# Altium PCB SuperGameBro_RevA0.PcbDoc (part 1 of 2)
Units mil, origin at the board's own origin, x right, y up, seen from the top; angles counter-clockwise.
Board outline 6943 x 4294 mil, 4 copper layers (Top Layer, GND, 3V3P, Bottom Layer), stack 33.234 mil thick; 149 components, 155 nets, 708 pads, 342 vias.
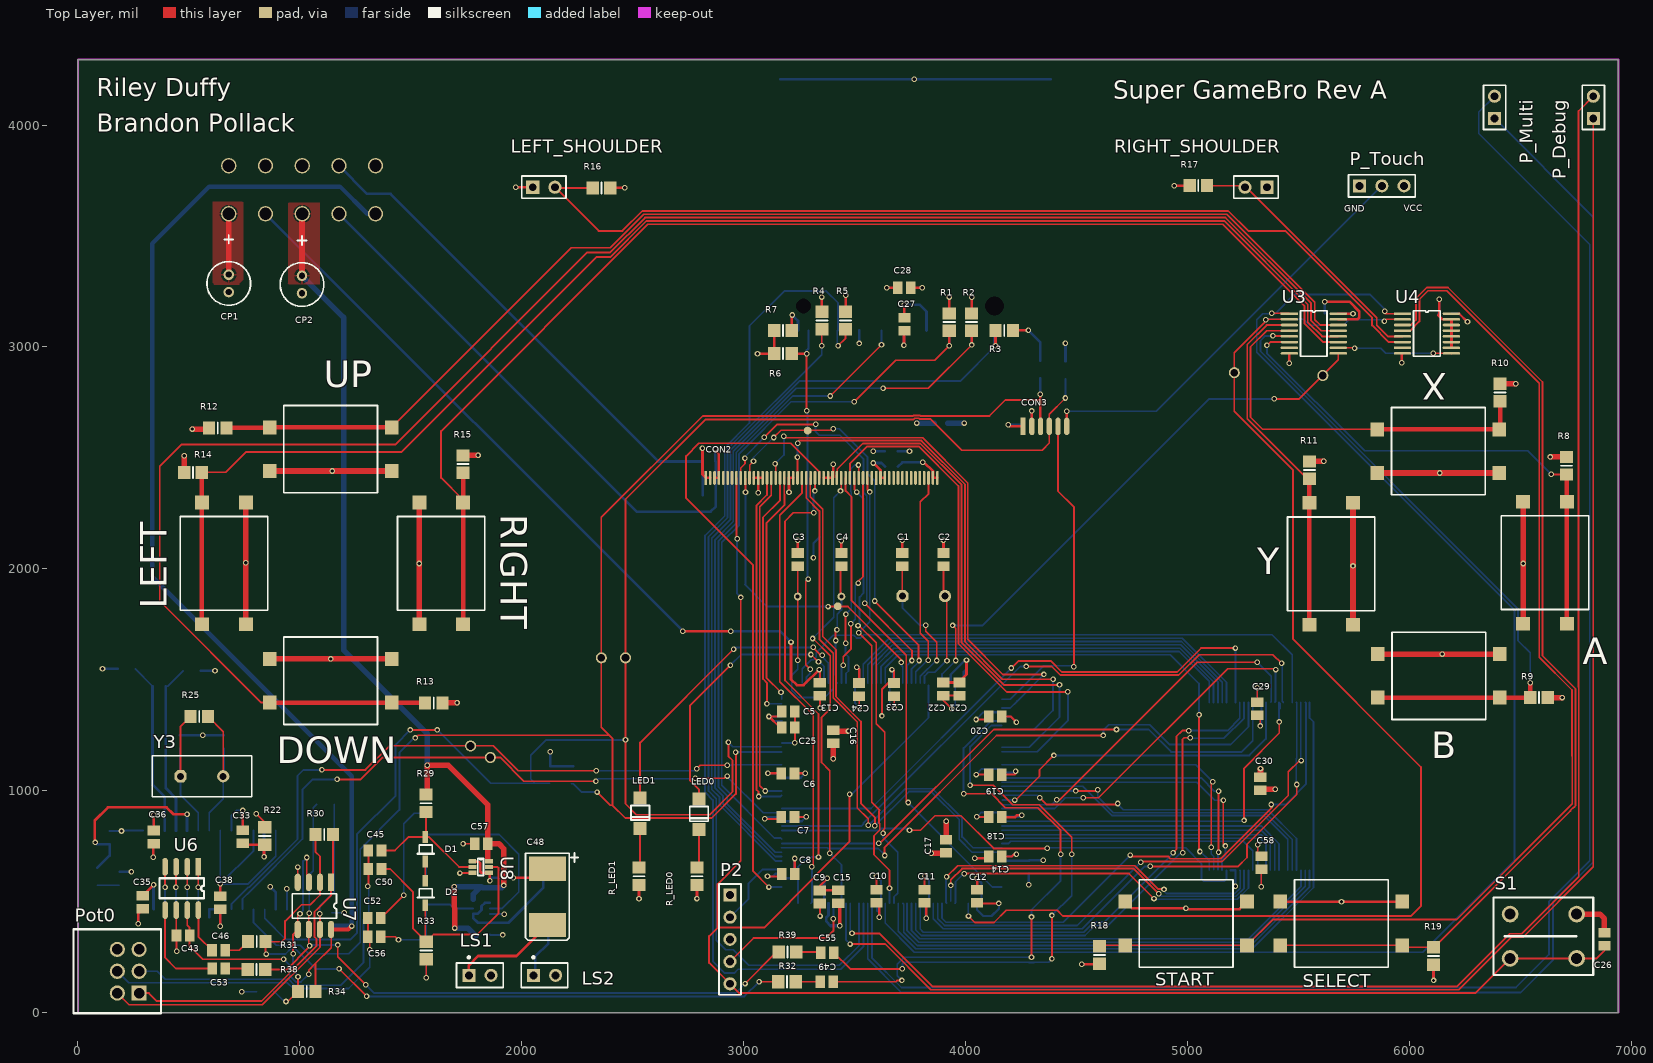
[diagram p0: Top Layer view]
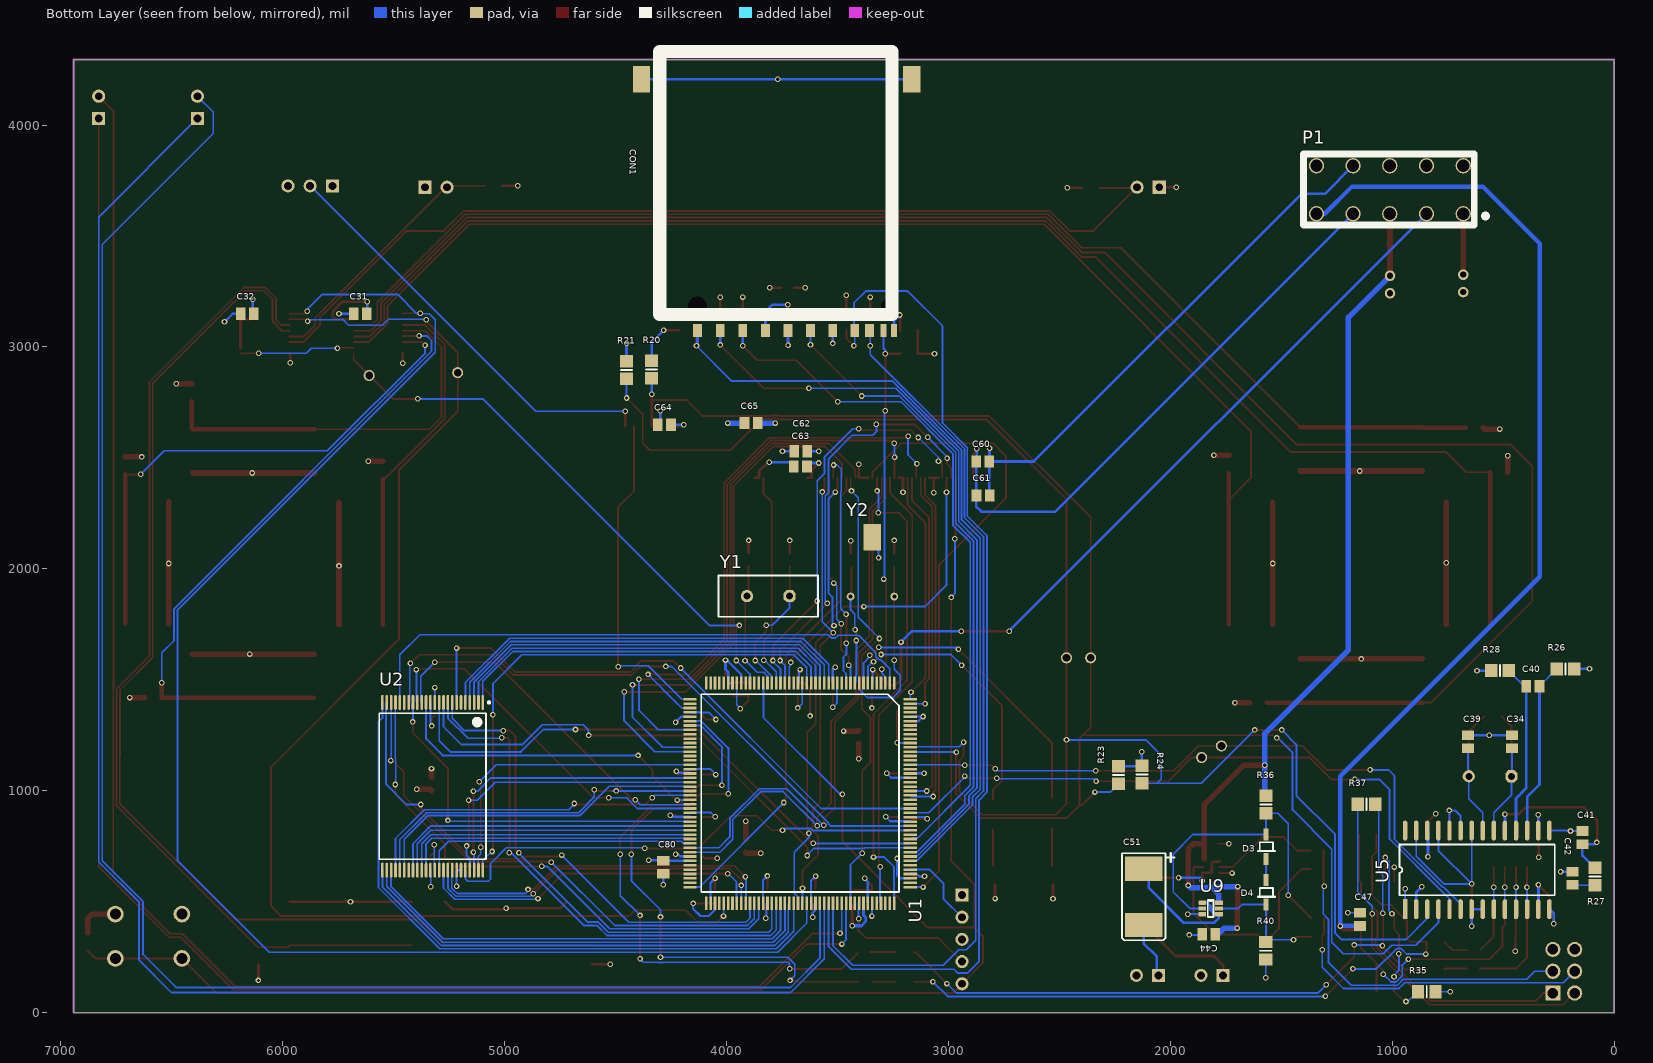
[diagram p1: Bottom Layer view, seen from below]
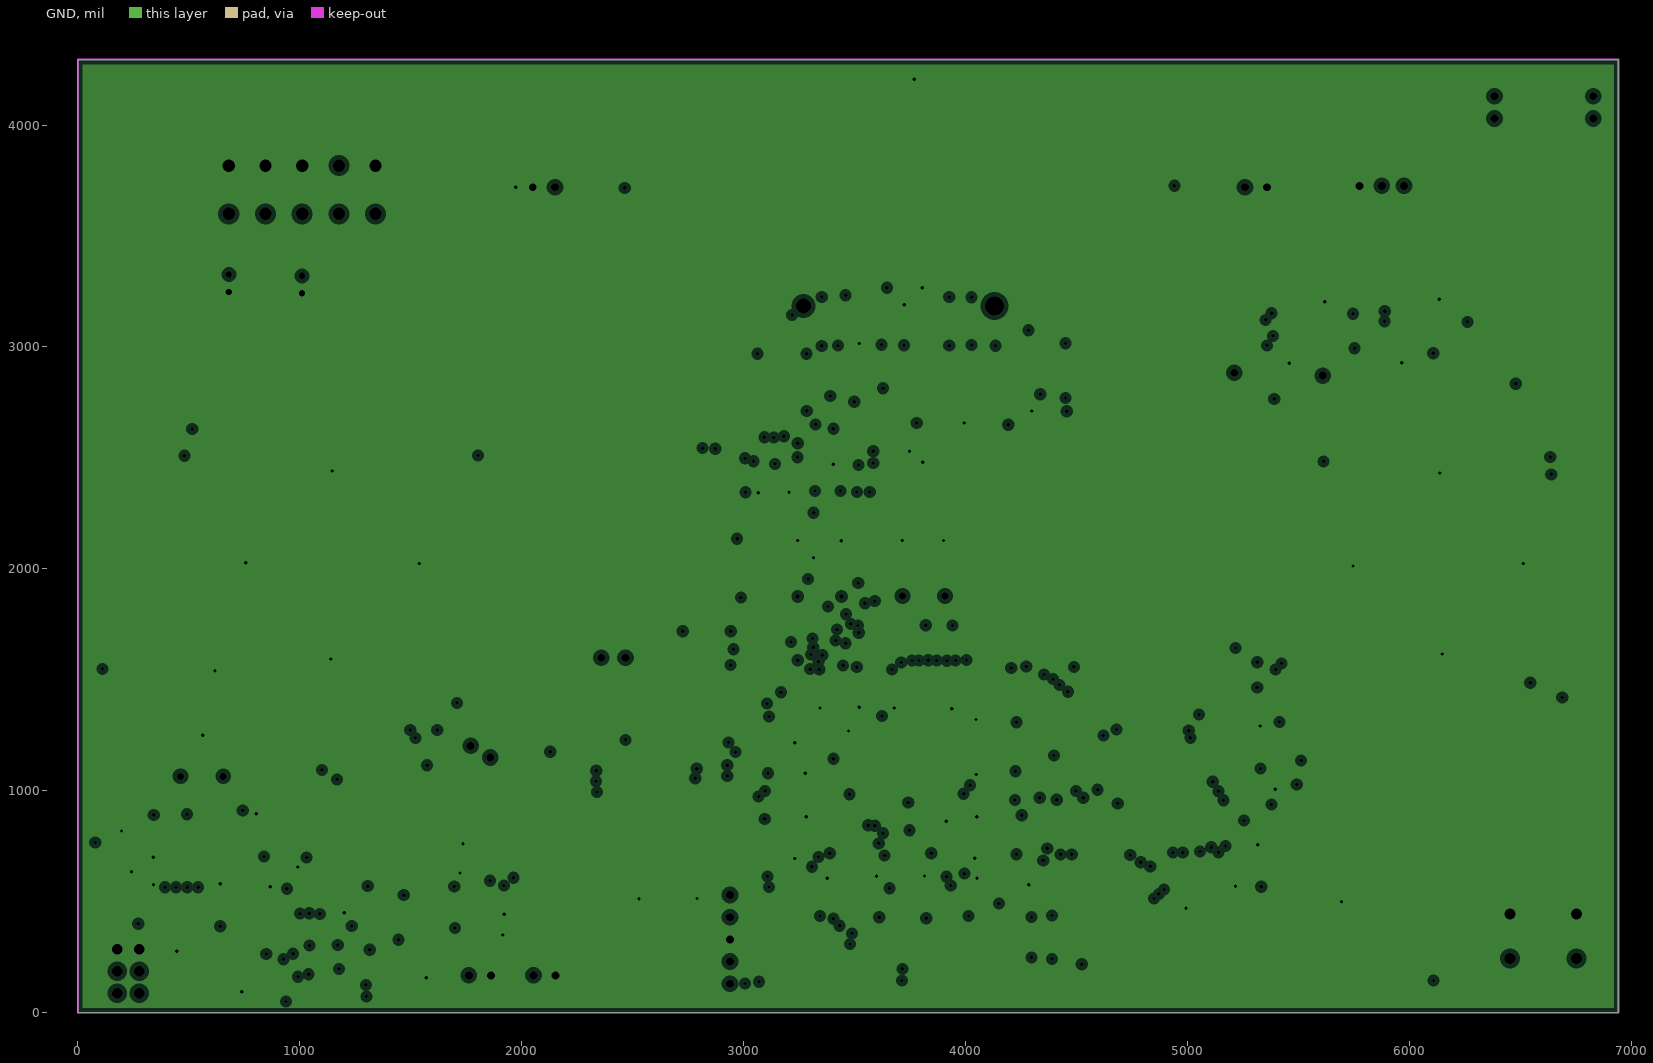
[diagram p2: GND, clearances drawn from the general rule]
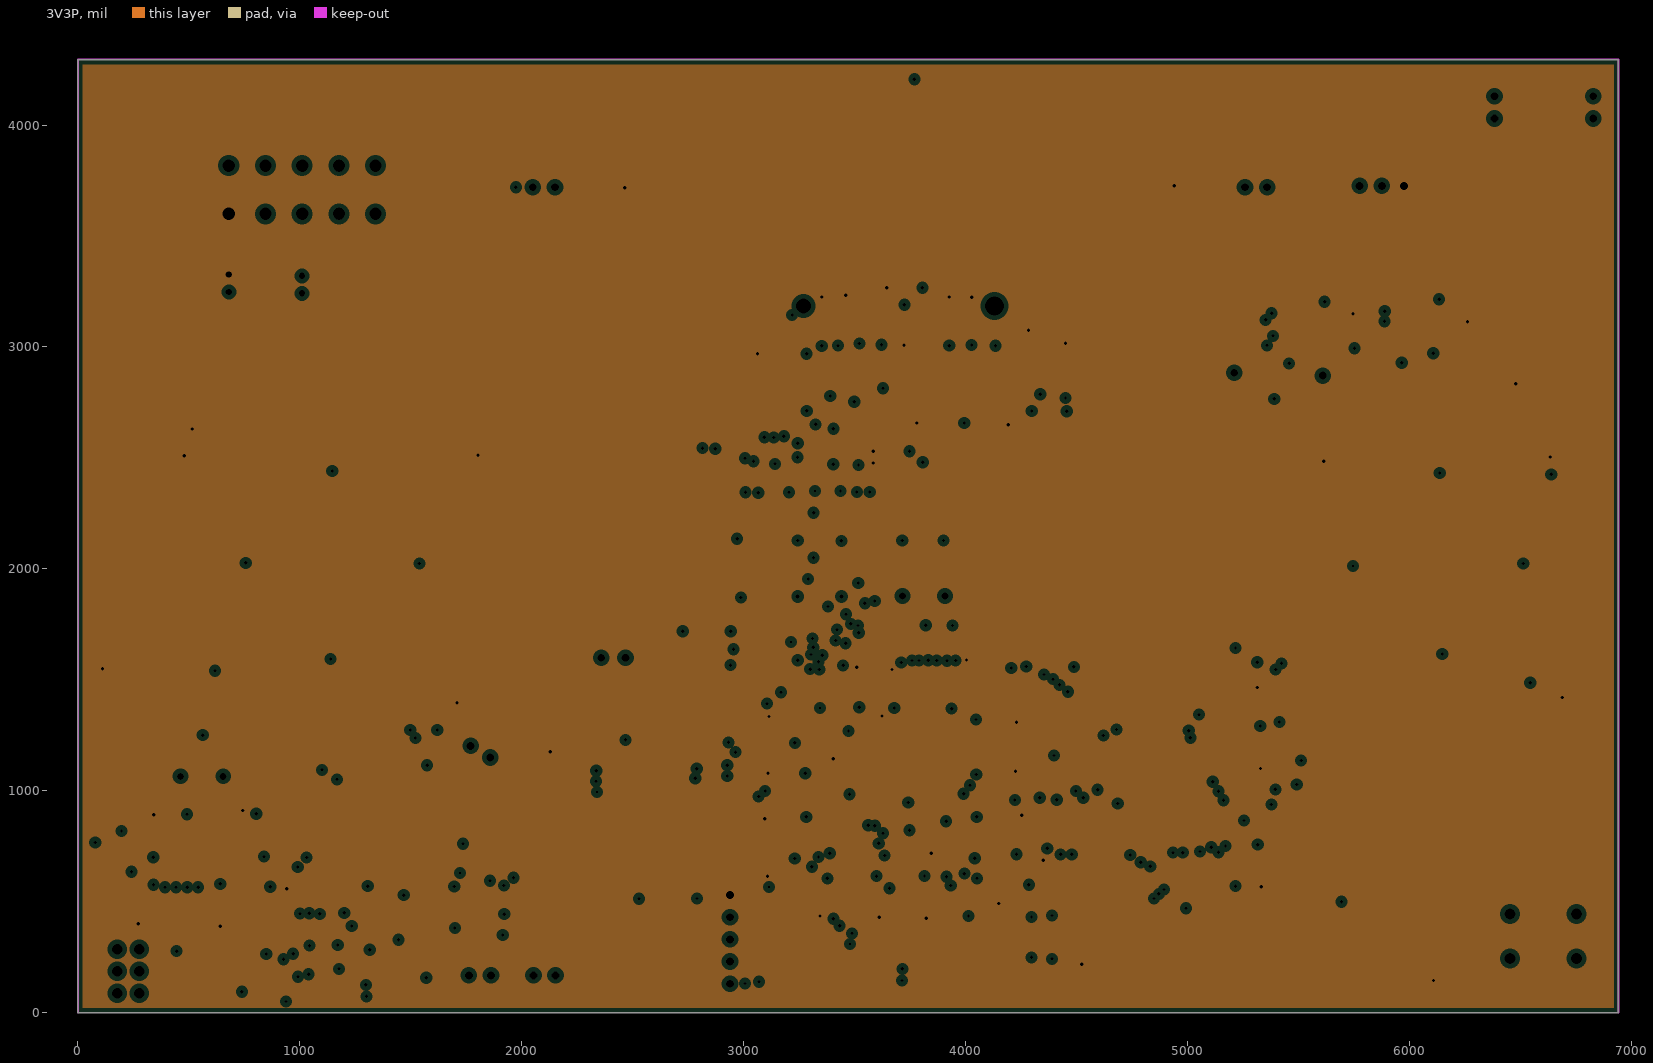
[diagram p3: 3V3P, clearances drawn from the general rule]

## Layer stack, top to bottom
Top Solder: solder mask 0.4, Solder Resist, Dk 3.5
Top Layer: signal copper 1.4
Dielectric 1: core 12.6, FR-4, Dk 4.8
GND: plane copper 1.417, net GND
Dielectric 3: prepreg 5, Dk 4.2
3V3P: plane copper 1.417, net 3V3P
Dielectric 4: core 10, Dk 4.2
Bottom Layer: signal copper 1.4
Bottom Solder: solder mask 0.4, Solder Resist, Dk 3.5

## Board outline
0,0 0,3140 0,4294 6943,4294 6943,0

## Design rules (kind name [scope] priority, off if disabled: settings)
Clearance Via_Clearance [(IsVia AND IsPad)] p1: gap=8
Clearance Clearance_CPU [InPadClass('SURFACE_MOUNTS') or TouchesRoom('CPU_NECK_ROOM') or TouchesRoom('LCD_NECK_ROOM')] p2: gap=5
Clearance [All] p3: gap=7
ComponentClearance [(HasFootprint('NHD3.5320240MF Outline'))] p1: gap=0 collisioncheckmode=3 verticalgap=0 showdistances=FALSE
HoleSize [All] p1: absolutevalues=TRUE maxlimit=100 minlimit=4 maxpercent=80.000 minpercent=20.000
MinimumAnnularRing pth [IsPad] p1: minimumring=7
MinimumAnnularRing via [IsVia] p2: minimumring=5
MinimumSolderMaskSliver [All] p1: minsoldermaskwidth=5
PlaneClearance [All] p1: clearance=20
PlaneConnect [All] p1: planeconnectstyle=Relief reliefexpansion=20 reliefentries=4 reliefconductorwidth=10 reliefairgap=10
PolygonConnect [All] p1: connectstyle=Relief reliefconductorwidth=10 reliefentries=4 polygonreliefangle="90 Angle" airgapwidth=10
RoomDefinition LCD_NECK_ROOM [InComponentClass('Room Definition 2')] p1: confinementstyle=ConfineIn formatcopy=TRUE lockcomponents=FALSE outline 2810.1,2695.65 4482.66,2695.65 4482.66,2380.25 4482.66,2344 2810.1,2344
RoomDefinition CPU_NECK_ROOM [InComponentClass('Room Definition 1')] p2: confinementstyle=ConfineIn formatcopy=TRUE lockcomponents=FALSE outline 3128.64,449.35 3128.64,1528.53 5550.98,1528.53 5550.98,449.35
RoutingVias [All] p1: holewidth=15 width=25 viastyle="Through Hole" minholewidth=8 minwidth=18 maxholewidth=28 maxwidth=50
SilkToSolderMaskClearance [IsPad] p1: minsilkscreentomaskgap=5 clearancetoexposedcopper=TRUE
SolderMaskExpansion [All] p1: expansion=4
Width Power [InNetClass('Power')] p1: maxlimit=50 minlimit=7 preferedwidth=30
Width [All] p2: maxlimit=20 minlimit=7 preferedwidth=7
24 further rules are at their usual default settings.

## Classes and differential pairs
net class FMC_DATA: FMC_D0 FMC_D1 FMC_D2 FMC_D3 FMC_D4 FMC_D5 FMC_D6 FMC_D7 FMC_D8 FMC_D9 FMC_D10 FMC_D11 FMC_D12 FMC_D13 FMC_D14 FMC_D15
net class Address: FMC_A0 FMC_A1 FMC_A2 FMC_A3 FMC_A4 FMC_A5 FMC_A6 FMC_A7 FMC_A8 FMC_A9 FMC_A10 FMC_A11 FMC_A12 FMC_A13 FMC_A14 FMC_A15 FMC_A16 FMC_A17 FMC_A18 FMC_A19
net class Power: 3V3P 3V3PB 5V0P 19V2P GND VCAP1 VCAP2
component class Buttons: A B C31 C32 DOWN LEFT LEFT_SHOULDER R8 R9 R10 R11 R12 R13 R14 R15 R16 R17 R18 R19 RIGHT RIGHT_SHOULDER SELECT START U3 U4 UP X Y
component class CPU_Power_XTAL_Prog: C1 C2 C3 C4 C5 C6 C7 C8 C9 C10 C11 C12 C13 C14 C15 C16 C17 C18 C19 C20 C21 C22 C23 C24 C25 C26 C80 CP1 CP2 LED0 LED1 P1 P2 P_Debug P_Multi R_LED0 R_LED1 S1 U1 Y1 Y2
pad class SURFACE_MOUNTS: CON2-A1 CON2-A2 CON2-A3 CON2-A4 CON2-A5 CON2-A6 CON2-A7 CON2-A8 CON2-A9 CON2-A10 CON2-A11 CON2-A12 CON2-A13 CON2-A14 CON2-A15 CON2-A16 CON2-A17 CON2-A18 CON2-A19 CON2-A20 CON2-A21 CON2-A22 CON2-A23 CON2-A24 CON2-A25 CON2-A26 CON2-A27 CON2-A28 CON2-A29 CON2-A30 CON2-A31 CON2-A32 CON2-A33 CON2-A34 CON2-A35 CON2-A36 CON2-A37 CON2-A38 CON2-A39 CON2-A40 CON2-A41 CON2-A42 CON2-A43 CON2-A44 CON2-A45 CON2-A46 CON2-A47 CON2-A48 CON2-A49 CON2-A50 CON2-A51 CON2-A52 CON2-A53 CON2-A54 CON3-1 CON3-2 CON3-3 CON3-4 CON3-5 CON3-6 D1-A D1-K D2-A D2-K D3-A D3-K D4-A D4-K U1-1 U1-2 U1-3 U1-4 U1-5 U1-6 U1-7 U1-8 U1-9 U1-10 U1-11 U1-12 U1-13 U1-14 U1-15 U1-16 U1-17 U1-18 U1-19 U1-20 U1-21 U1-22 U1-23 U1-24 U1-25 U1-26 U1-27 U1-28 U1-29 U1-30 U1-31 U1-32 U1-33 U1-34 U1-35 U1-36 U1-37 U1-38 U1-39 U1-40 U1-41 U1-42 U1-43 U1-44 U1-45 U1-46 U1-47 U1-48 U1-49 U1-50 U1-51 U1-52 U1-53 U1-54 U1-55 U1-56 U1-57 U1-58 U1-59 U1-60 U1-61 U1-62 U1-63 U1-64 U1-65 U1-66 U1-67 U1-68 U1-69 U1-70 U1-71 U1-72 U1-73 U1-74 U1-75 U1-76 U1-77 U1-78 U1-79 U1-80 U1-81 U1-82 U1-83 U1-84 U1-85 U1-86 U1-87 U1-88 U1-89 U1-90 U1-91 U1-92 U1-93 U1-94 U1-95 U1-96 U1-97 U1-98 U1-99 U1-100 U1-101 U1-102 U1-103 U1-104 U1-105 U1-106 U1-107 U1-108 U1-109 U1-110 U1-111 U1-112 U1-113 U1-114 U1-115 U1-116 U1-117 U1-118 U1-119 U1-120 U1-121 U1-122 U1-123 U1-124 U1-125 U1-126 U1-127 U1-128 U1-129 U1-130 U1-131 U1-132 U1-133 U1-134 U1-135 U1-136 U1-137 U1-138 U1-139 U1-140 U1-141 U1-142 U1-143 U1-144 U1-145 U1-146 U1-147 U1-148 U1-149 U1-150 U1-151 U1-152 U1-153 U1-154 U1-155 U1-156 U1-157 U1-158 U1-159 U1-160 U1-161 U1-162 U1-163 U1-164 U1-165 U1-166 U1-167 U1-168 U1-169 U1-170 U1-171 U1-172 U1-173 U1-174 U1-175 U1-176 U2-1 U2-2 U2-3 U2-4 U2-5 U2-6 U2-7 U2-8 U2-9 U2-10 U2-11 U2-12 U2-13 U2-14 U2-15 U2-16 U2-17 U2-18 U2-19 U2-20 U2-21 U2-22 U2-23 U2-24 U2-25 U2-26 U2-27 U2-28 U2-29 U2-30 U2-31 U2-32 U2-33 U2-34 U2-35 U2-36 U2-37 U2-38 U2-39 U2-40 U2-41 U2-42 U2-43 U2-44 U2-45 U2-46 U2-47 U2-48 U5-1 U5-2 U5-3 U5-4 U5-5 U5-6 U5-7 U5-8 U5-9 U5-10 U5-11 U5-12 U5-13 U5-14 U5-15 U5-16 U5-17 U5-18 U5-19 U5-20 U5-21 U5-22 U5-23 U5-24 U5-25 U5-26 U5-27 U5-28 U6-1 U6-2 U6-3 U6-4 U6-5 U6-6 U6-7 U6-8 U7-1 U7-2 U7-3 U7-4 U7-5 U7-6 U7-7 U7-8 U8-1 U8-2 U8-3 U8-4 U8-5 U8-6 U9-1 U9-2 U9-3 U9-4 U9-5 U9-6
component class sdcard_ram: C27 C28 C29 C30 C58 CON1 R1 R2 R3 R4 R5 R6 R7 U2
component class LCD_touch_conn: C60 C61 C62 C63 C64 C65 CON2 CON3 P_Touch R20 R21
component class Audio: C33 C34 C35 C36 C38 C39 C40 C41 C42 C43 C44 C45 C46 C47 C48 C49 C50 C51 C52 C53 C55 C56 C57 D1 D2 D3 D4 LS1 LS2 Pot0 R22 R23 R24 R25 R26 R27 R28 R29 R30 R31 R32 R33 R34 R35 R36 R37 R38 R39 R40 U5 U6 U7 U8 U9 Y3

## Components (designator, comment, footprint, x,y, rotation, side; value= is the part's Value field where it differs from the comment)
A "12mmBTN" SMT12mmbutton 6514,1753 r90 top
B "12mmBTN" SMT12mmbutton 5859,1616 r0 top (schematic designator S3)
C1 "18 pF" C0805 3715,2042 r270 top
C2 "18 pF" C0805 3901,2042 r270 top
C3 "12.5 pF" C0805 3244,2042 r270 top
C4 "12.5 pF" C0805 3441,2042 r270 top
C5 "100nF" C0805 3201,1357 r180 top
C6 "100nF" C0805 3200,1078 r180 top
C7 "100nF" C0805 3200,881 r180 top
C8 "100nF" C0805 3201,625 r180 top
C9 "100nF" C0805 3344,521 r270 top
C10 "100nF" C0805 3599,525 r270 top
C11 "100nF" C0805 3816,525 r270 top
C12 "100nF" C0805 4052,525 r270 top
C13 "100nF" C0805 3344,1457 r270 top
C14 "2.2 uF" C0805 4135,703 r180 top
C15 "2.2 uF" C0805 3427,522 r90 top
C16 "10 uF" C0805 3404,1243 r270 top
C17 "10 uF" C0805 3912,750 r270 top
C18 "100nF" C0805 4135,881 r0 top
C19 "100nF" C0805 4135,1072 r0 top
C20 "100nF" C0805 4135,1334 r0 top
C21 "100nF" C0805 3974,1458 r90 top
C22 "100nF" C0805 3900,1458 r90 top
C23 "100nF" C0805 3678,1456 r90 top
C24 "100nF" C0805 3521,1456 r90 top
C25 "100nF" C0805 3201,1285 r180 top
C26 "100nF" C0805 6880,331 r270 top
C27 "100nF" C0805 3725,3103 r270 top
C28 "4.7 uF" C0805 3725,3267 r180 top
C29 "100nF" C0805 5315,1369 r90 top
C30 "4.7 uF" C0805 5329,1032 r90 top
C31 "100nF" C0805 5651,3150 r0 bottom
C32 "100nF" C0805 6161,3150 r0 bottom
C33 "100nF" C0805 743,792 r270 top
C34 "47 pF" C0805 460,1221 r270 bottom
C35 "100nF" C0805 292,497 r270 top
C36 "100nF" C0805 342,791 r90 top
C38 "220nF" C0805 642,495 r270 top
C39 "47 pF" C0805 658,1221 r270 bottom
C40 "100nF" C0805 366,1471 r180 bottom
C41 "470pf" C0805 143,789 r270 bottom
C42 "4.7nF" C0805 188,605 r270 bottom
C43 "100nF" C0805 474,347 r0 top
C44 "10 uF" C0805 1827,353 r180 bottom
C45 "47 uF" C0805 1339,731 r0 top
C46 "47 uF" C0805 634,280.59 r0 top
C47 "100nF" C0805 1145,420 r90 bottom
C48 "Cap Pol1" C2917 2116,522 r270 top
C49 "47 uF" C0805 3375,139 r180 top
C50 "47 uF" C0805 1339,647 r0 top
C51 "Cap Pol1" C2917 2120,522 r270 bottom
C52 "47 uF" C0805 1336,426 r0 top
C53 "47 uF" C0805 635,198.59 r0 top
C55 "47 uF" C0805 3378,270 r180 top
C56 "47 uF" C0805 1336,342 r0 top
C57 "10 uF" C0805 1818,761 r0 top
C58 "100nF" C0805 5335,675 r270 top
C60 "100nF" C0805 2846,2484 r0 bottom
C61 "100nF" C0805 2844,2331 r0 bottom
C62 "100nF" C0805 3667,2461 r180 bottom
C63 "100nF" C0805 3666,2530 r180 bottom
C64 "100nF" C0805 4280,2649 r180 bottom
C65 "4.7 uF" C0805 3890,2657 r180 bottom
C80 "100nF" C0805 4286,655 r90 bottom
CON1 "SD Card Connector" SD_CARD_FP 3758,3591 r0 bottom
CON2 "LCD" "MOLEX54 - DUPLICATE2" 2830,2410 r0 top
CON3 "LCD I2C" MOLEX6 4260,2642.28 r0 top
CP1 "47uF" KemetC3 680,3247 r90 top
CP2 "47uF" KemetC3 1010,3242 r90 top
D1 "Diode 1N4148" Diode 1566,736 r270 top
D2 "Diode 1N4148" Diode 1566,539 r270 top
D3 "Diode 1N4148" Diode 1569,748 r270 bottom
D4 "Diode 1N4148" Diode 1569,542 r270 bottom
DOWN "12mmBTN" SMT12mmbutton 864.79,1594 r0 top (schematic designator S3)
LED0 "LED0" LED-LTST 2799,894 r270 top
LED1 "LED0" LED-LTST 2534,899 r270 top
LEFT "12mmBTN" SMT12mmbutton 757,2299 r270 top (schematic designator X)
LEFT_SHOULDER "12mmBTN" HDR1X2 2050,3720 r0 top
LS1 "Speaker" PIN2 1762,168 r0 top
LS2 "Speaker" PIN2 2053,168 r0 top
P1 "Value" "Molex MiniFit Jr10" 680,3600 r0 bottom
P2 "Header 5" HDR1X5 2939,530 r270 top
P_Debug "Header 2" HDR1X2 6830,4030 r90 top
P_Multi "Header 2" HDR1X2 6385,4030 r90 top
P_Touch "Header 3" HDR1X3 5777,3726 r0 top
Pot0 "Dual_GagPOT" DGPOT 276,88 r180 top
R1 "47K" 6-0805_M 3927,3112 r90 top
R2 "47K" 6-0805_M 4028,3112 r90 top
R3 "47K" 6-0805_M 4175,3075 r0 top
R4 "47K" 6-0805_M 3353,3119 r90 top
R5 "47K" 6-0805_M 3460,3119 r90 top
R6 "47K" 6-0805_M 3178,2971 r0 top
R7 "47K" 6-0805_M 3178,3074 r0 top
R8 "10K" 6-0805_M 6710,2465 r270 top
R9 "10K" 6-0805_M 6585,1420 r180 top
R10 "10K" 6-0805_M 6410,2795 r270 top
R11 "10K" 6-0805_M 5550,2445 r270 top
R12 "10K" 6-0805_M 630,2635 r0 top
R13 "10K" 6-0805_M 1604,1396 r180 top
R14 "10K" 6-0805_M 519,2435 r0 top
R15 "10K" 6-0805_M 1735,2472 r270 top
R16 "10K" 6-0805_M 2360,3717 r180 top
R17 "10K" 6-0805_M 5050,3727 r0 top
R18 "10K" 6-0805_M 4605,260 r90 top
R19 "10K" 6-0805_M 6110,255 r90 top
R20 "10K" 6-0805_M 4338,2898 r270 bottom
R21 "10K" 6-0805_M 4451,2896 r270 bottom
R22 "1k" 6-0805_M 842,796 r270 top
R23 "10K" 6-0805_M 2233,1071 r90 bottom
R24 "10K" 6-0805_M 2127,1073 r90 bottom
R25 "1Meg" 6-0805_M 547,1335 r180 top
R26 "4.7" 6-0805_M 219,1549 r0 bottom
R27 "1K" 6-0805_M 87,613 r270 bottom
R28 "4.7" 6-0805_M 514,1541 r0 bottom
R29 "1K" 6-0805_M 1569,944 r270 top
R30 "400k" 6-0805_M 1110,802 r0 top
R31 "700k" 6-0805_M 806,319.59 r0 top
R32 "700K" 6-0805_M 3196,139 r180 top
R33 "1K" 6-0805_M 1570,280 r270 top
R34 "10K" 6-0805_M 1031,95 r180 top
R35 "35k" 6-0805_M 844,94 r0 bottom
R36 "1K" 6-0805_M 1569,938 r270 bottom
R37 "400k" 6-0805_M 1116,939 r0 bottom
R38 "700k" 6-0805_M 805,194 r0 top
R39 "700K" 6-0805_M 3198,272.31 r180 top
R40 "1K" 6-0805_M 1570,279 r270 bottom
R_LED0 "65" 6-0805_M 2790,615 r270 top
R_LED1 "65" 6-0805_M 2529,615 r270 top
RIGHT "12mmBTN" SMT12mmbutton 1539,1749.79 r90 top (schematic designator A)
RIGHT_SHOULDER "12mmBTN" HDR1X2 5360,3720 r180 top
S1 "Value" Reset_Button 6829,170 r180 top
SELECT "12mmBTN" SMT12mmbutton 5420,500 r0 top locked
START "12mmBTN" SMT12mmbutton 4720,500 r0 top locked
U1 "STM32F439II6" LQFP76 3245,1485 r270 bottom locked
U2 "IS61WV102416BLL-10TLI" ISSI-TSOP-1-48-12000X20000DE_N 5325,1020 r270 bottom
U3 "SN74LV165" SOP16_Hand 5460,3150 r0 top
U4 "SN74LV165" SOP16_Hand 5970,3150 r0 top
U5 "STA013_MP3Decode" SOP28 942,466 r90 bottom
U6 "MAX5556ESA+-ND" SOIC8_DAC 543,657 r270 top
U7 "MCP6022 OpAmp" SOP8_OPAMP 1141,587 r270 top
U8 "BJT" BJT_SOT6 1778,682 r0 top
U9 "BJT" BJT_SOT6 1856,495 r180 bottom
UP "12mmBTN" SMT12mmbutton 1414,2441 r180 top (schematic designator Y)
X "12mmBTN" SMT12mmbutton 6406,2432 r180 top (schematic designator Y)
Y "12mmBTN" SMT12mmbutton 5747,2297 r270 top (schematic designator X)
Y1 "8 Mhz" HC-49U 3812,1877 r0 bottom
Y2 "32.768Khz" "C-2Type Crystal" 3441,1875 r180 bottom
Y3 "14.756Mhz" HC-49U 559,1065 r0 top

## Footprints (in the part's own frame and the unit in brackets; to place one, negate y for a bottom-side part, rotate by r counter-clockwise, add the part's x,y. Pads: shape width x height; smd on the part's side, far side on the other; paste and mask are expansions set on the pad)
6-0805_M [mm] "Chip Resistor, Body 2.0x1.2mm, IPC Low Density"
  rect 1.4x1.5 smd: 1(-1,0) 2(1,0)
  silkscreen extent 0,-0.65 0,0.65, body extent -1.07,-0.7 1.07,0.7, height 0.7
BJT_SOT6 [mm]
  rrect50% 0.9x0.5 smd: 1(0,0)
  rect 0.9x0.5 smd: 2(0,-0.65) 3(0,-1.3) 4(1.9,-1.3) 5(1.9,-0.65) 6(1.9,0)
  silkscreen extent 0.62,-1.63 1.28,0.33
C0805 [mm] "Chip Capacitor, Body 2.0x1.3mm, IPC High Density"
  rect 1.1x1.4 smd: 1(-0.75,0) 2(0.75,0)
  body extent -1.1,-0.72 1.1,0.72, height 1.4
C2917 [mm]
  rect 2.77x4.25 smd: 1(-3.22,0) 2(3.22,0)
  silkscreen extent -5,-2.5 4.98,3.5
"C-2Type Crystal" [mm]
  round 0.9 hole 0.45: 1(5,0) 2(0,0)
  rect 2x3 smd: 3(2.5,6.8)
DGPOT [mm]
  rect 1.735x1.735 hole 1.2 mask+0.102: 1(0,0)
  round 1.735 hole 1.2 mask+0.102: 2(0,-2.5) 3(0,-5) 4(2.5,-5) 5(2.5,-2.5) 6(2.5,0)
  silkscreen extent -2.5,-7.3 7.5,2.3
Diode [mm] "Diode, Axial; Body 3.8 x 1.9 mm (LxDia. max), Lead Dia. 0.53 mm (max)"
  rect 1.35x0.6 smd: A(-1.4,0) K(1.4,0)
  silkscreen extent -0.5,-0.9 0.5,1
HC-49U [mm] "Quartz Crystal, Thru-Hole; 2 Leads; Body 11.35 x 4.65 x 13.46 mm (LxWxH max)"
  oct 1.4x1.4 hole 0.8: 1(-2.44,0)
  round 1.4 hole 0.8: 2(2.44,0)
  silkscreen extent -5.7,-2.35 5.7,2.35
HDR1X2 [mm] "Connector; Header; 2 Position"
  rect 1.5x1.5 hole 0.9: 1(0,0)
  round 1.5 hole 0.9: 2(2.54,0)
  silkscreen extent -1.27,-1.27 3.81,1.27
HDR1X3 [mm] "Connector; Header; 3 Position"
  rect 1.5x1.5 hole 0.9: 1(0,0)
  round 1.5 hole 0.9: 2(2.54,0) 3(5.08,0)
  silkscreen extent -1.27,-1.27 6.35,1.27
HDR1X5 [mm] "Connector; Header; 5 Position"
  rect 1.5x1.5 hole 0.9: 1(0,0)
  round 1.5 hole 0.9: 2(2.54,0) 3(5.08,0) 4(7.62,0) 5(10.16,0)
  silkscreen extent -1.27,-1.27 11.43,1.27
ISSI-TSOP-1-48-12000X20000DE_N [mm] "SOP, 48-Leads, Body 18.6x12.2mm, Pitch 0.5mm, IPC Medium Density"
  oval 1.7x0.3 smd: 1(-9.6,5.75) 2(-9.6,5.25) 3(-9.6,4.75) 4(-9.6,4.25) 5(-9.6,3.75) 6(-9.6,3.25) 7(-9.6,2.75) 8(-9.6,2.25) 9(-9.6,1.75) 10(-9.6,1.25) 11(-9.6,0.75) 12(-9.6,0.25) 13(-9.6,-0.25) 14(-9.6,-0.75) 15(-9.6,-1.25) 16(-9.6,-1.75) 17(-9.6,-2.25) 18(-9.6,-2.75) 19(-9.6,-3.25) 20(-9.6,-3.75) 21(-9.6,-4.25) 22(-9.6,-4.75) 23(-9.6,-5.25) 24(-9.6,-5.75) 25(9.6,-5.75) 26(9.6,-5.25) 27(9.6,-4.75) 28(9.6,-4.25) 29(9.6,-3.75) 30(9.6,-3.25) 31(9.6,-2.75) 32(9.6,-2.25) 33(9.6,-1.75) 34(9.6,-1.25) 35(9.6,-0.75) 36(9.6,-0.25) 37(9.6,0.25) 38(9.6,0.75) 39(9.6,1.25) 40(9.6,1.75) 41(9.6,2.25) 42(9.6,2.75) 43(9.6,3.25) 44(9.6,3.75) 45(9.6,4.25) 46(9.6,4.75) 47(9.6,5.25) 48(9.6,5.75)
  silkscreen extent -9.72,-6.1 8.35,6.57, body extent -9.3,-6.1 9.3,6.1, height 1.2
KemetC3 [mm]
  round 1.2 hole 0.7: 1(0,0) 2(2,0)
  silkscreen extent -1.5,-2.5 6.55,2.5
LED-LTST [mm]
  rect 1.5x1.5 smd: A(-1.75,0) K(1.75,0)
  silkscreen extent -0.87,-1.05 0.8,1.07
LQFP76 [mm]
  oval 1.5x0.3 smd: 1(0,0)
  rect 1.5x0.3 smd: 2(0,-0.5) 3(0,-1) 4(0,-1.5) 5(0,-2) 6(0,-2.5) 7(0,-3) 8(0,-3.5) 9(0,-4) 10(0,-4.5) 11(0,-5) 12(0,-5.5) 13(0,-6) 14(0,-6.5) 15(0,-7) 16(0,-7.5) 17(0,-8) 18(0,-8.5) 19(0,-9) 20(0,-9.5) 21(0,-10) 22(0,-10.5) 23(0,-11) 24(0,-11.5) 25(0,-12) 26(0,-12.5) 27(0,-13) 28(0,-13.5) 29(0,-14) 30(0,-14.5) 31(0,-15) 32(0,-15.5) 33(0,-16) 34(0,-16.5) 35(0,-17) 36(0,-17.5) 37(0,-18) 38(0,-18.5) 39(0,-19) 40(0,-19.5) 41(0,-20) 42(0,-20.5) 43(0,-21) 44(0,-21.5) 89(25.2,-21.5) 90(25.2,-21) 91(25.2,-20.5) 92(25.2,-20) 93(25.2,-19.5) 94(25.2,-19) 95(25.2,-18.5) 96(25.2,-18) 97(25.2,-17.5) 98(25.2,-17) 99(25.2,-16.5) 100(25.2,-16) 101(25.2,-15.5) 102(25.2,-15) 103(25.2,-14.5) 104(25.2,-14) 105(25.2,-13.5) 106(25.2,-13) 107(25.2,-12.5) 108(25.2,-12) 109(25.2,-11.5) 110(25.2,-11) 111(25.2,-10.5) 112(25.2,-10) 113(25.2,-9.5) 114(25.2,-9) 115(25.2,-8.5) 116(25.2,-8) 117(25.2,-7.5) 118(25.2,-7) 119(25.2,-6.5) 120(25.2,-6) 121(25.2,-5.5) 122(25.2,-5) 123(25.2,-4.5) 124(25.2,-4) 125(25.2,-3.5) 126(25.2,-3) 127(25.2,-2.5) 128(25.2,-2) 129(25.2,-1.5) 130(25.2,-1) 131(25.2,-0.5) 132(25.2,0)
  rect 0.3x1.5 smd: 45(1.85,-23.35) 46(2.35,-23.35) 47(2.85,-23.35) 48(3.35,-23.35) 49(3.85,-23.35) 50(4.35,-23.35) 51(4.85,-23.35) 52(5.35,-23.35) 53(5.85,-23.35) 54(6.35,-23.35) 55(6.85,-23.35) 56(7.35,-23.35) 57(7.85,-23.35) 58(8.35,-23.35) 59(8.85,-23.35) 60(9.35,-23.35) 61(9.85,-23.35) 62(10.35,-23.35) 63(10.85,-23.35) 64(11.35,-23.35) 65(11.85,-23.35) 66(12.35,-23.35) 67(12.85,-23.35) 68(13.35,-23.35) 69(13.85,-23.35) 70(14.35,-23.35) 71(14.85,-23.35) 72(15.35,-23.35) 73(15.85,-23.35) 74(16.35,-23.35) 75(16.85,-23.35) 76(17.35,-23.35) 77(17.85,-23.35) 78(18.35,-23.35) 79(18.85,-23.35) 80(19.35,-23.35) 81(19.85,-23.35) 82(20.35,-23.35) 83(20.85,-23.35) 84(21.35,-23.35) 85(21.85,-23.35) 86(22.35,-23.35) 87(22.85,-23.35) 88(23.35,-23.35) 133(23.35,1.85) 134(22.85,1.85) 135(22.35,1.85) 136(21.85,1.85) 137(21.35,1.85) 138(20.85,1.85) 139(20.35,1.85) 140(19.85,1.85) 141(19.35,1.85) 142(18.85,1.85) 143(18.35,1.85) 144(17.85,1.85) 145(17.35,1.85) 146(16.85,1.85) 147(16.35,1.85) 148(15.85,1.85) 149(15.35,1.85) 150(14.85,1.85) 151(14.35,1.85) 152(13.85,1.85) 153(13.35,1.85) 154(12.85,1.85) 155(12.35,1.85) 156(11.85,1.85) 157(11.35,1.85) 158(10.85,1.85) 159(10.35,1.85) 160(9.85,1.85) 161(9.35,1.85) 162(8.85,1.85) 163(8.35,1.85) 164(7.85,1.85) 165(7.35,1.85) 166(6.85,1.85) 167(6.35,1.85) 168(5.85,1.85) 169(5.35,1.85) 170(4.85,1.85) 171(4.35,1.85) 172(3.85,1.85) 173(3.35,1.85) 174(2.85,1.85) 175(2.35,1.85) 176(1.85,1.85)
  silkscreen extent 1.28,-22.06 23.91,0.57
MOLEX6 [mm]
  rect 0.6x2 smd paste+0: 1(0,0)
  oval 0.6x2 smd paste+0: 2(1,0) 3(2,0) 4(3,0) 5(4,0) 6(5,0)
"MOLEX54 - DUPLICATE2" [mm]
  rect 0.3x1.6 smd: A1(0,0) A10(4.5,0) A20(9.5,0) A30(14.5,0) A40(19.5,0) A50(24.5,0)
  oval 0.3x1.6 smd: A2(0.5,0) A3(1,0) A4(1.5,0) A5(2,0) A6(2.5,0) A7(3,0) A8(3.5,0) A9(4,0) A11(5,0) A12(5.5,0) A13(6,0) A14(6.5,0) A15(7,0) A16(7.5,0) A17(8,0) A18(8.5,0) A19(9,0) A21(10,0) A22(10.5,0) A23(11,0) A24(11.5,0) A25(12,0) A26(12.5,0) A27(13,0) A28(13.5,0) A29(14,0) A31(15,0) A32(15.5,0) A33(16,0) A34(16.5,0) A35(17,0) A36(17.5,0) A37(18,0) A38(18.5,0) A39(19,0) A41(20,0) A42(20.5,0) A43(21,0) A44(21.5,0) A45(22,0) A46(22.5,0) A47(23,0) A48(23.5,0) A49(24,0) A51(25,0) A52(25.5,0) A53(26,0) A54(26.5,0)
"Molex MiniFit Jr10" [mil] "10 pin minifit jr (power cable)"
  round 69 hole 55: 1(0,0) 2(0,-217) 3(165.5,0) 4(165.5,-217) 5(330.9,0) 6(330.9,-217) 7(496.3,0) 8(496.3,-217) 9(661.7,0) 10(661.7,-217)
  silkscreen extent -110,-270 720,50
PIN2 [mm] "Photosensitive Diode; 2 Leads"
  rect 1.5x1.5 hole 0.9: 1(0,0)
  round 1.5 hole 0.9: 2(2.54,0)
  silkscreen extent -1.4,-1.4 3.94,2.17
Reset_Button [mil]
  round 75 hole 50: 0(74.25,-74.13) 0(374.25,-74.13) 1(74.25,-274.13) 1(374.25,-274.13)
  silkscreen extent -1,-349 449,1
SD_CARD_FP [mm]
  round 0 hole 1.7: 0(-12.39,10.325)
  round 0 hole 2.2: 0(9.47,10.325)
  rect 1x1.5 smd: 1(6.88,13.125) 2(4.29,13.125) 3(1.7,13.125) 4(-0.89,13.125) 5(-3.46,13.125) 6(-5.99,13.125) 7(-8.52,13.125) 8(-10.22,13.125) 9(9.47,13.125)
  rect 2x3 smd: 3(-15.05,-15.625) 6(15.89,-15.625)
  rect 0.7x1.5 smd: 10(-11.82,13.125) 11(-13.02,13.125)
  silkscreen extent -12.8,-18.8 13.8,11.3
SMT12mmbutton [mm]
  rect 1.55x1.6 smd: 0(0,0) 0(13.95,0) 1(0,-5) 1(13.95,-5)
  silkscreen extent 1.61,-7.5 12.34,2.5
SOIC8_DAC [mil]
  rect 80x25 smd: 1(0,0)
  oval 80x25 smd: 2(0,-50) 3(0,-100) 4(0,-150) 5(195,-150) 6(195,-100) 7(195,-50) 8(195,0)
  silkscreen extent 51,-175 142,25
SOP8_OPAMP [mm]
  rect 2x0.7 smd: 1(0,0)
  oval 2x0.7 smd: 2(0,-1.27) 3(0,-2.54) 4(0,-3.81) 5(5.4,-3.81) 6(5.4,-2.54) 7(5.4,-1.27) 8(5.4,0)
  silkscreen extent 1.3,-4.44 4.1,0.64
SOP16_Hand [mm]
  rect 2x0.3 smd: 1(0,0)
  oval 2x0.3 smd: 2(0,-0.65) 3(0,-1.3) 4(0,-1.95) 5(0,-2.6) 6(0,-3.25) 7(0,-3.9) 8(0,-4.55) 9(5.6,-4.55) 10(5.6,-3.9) 11(5.6,-3.25) 12(5.6,-2.6) 13(5.6,-1.95) 14(5.6,-1.3) 15(5.6,-0.65) 16(5.6,0)
  silkscreen extent 1.27,-4.87 4.32,0.33
SOP28 [mil]
  rect 90x20 smd: 1(0,0)
  oval 90x20 smd: 2(0,-50) 3(0,-100) 4(0,-150) 5(0,-200) 6(0,-250) 7(0,-300) 8(0,-350) 9(0,-400) 10(0,-450) 11(0,-500) 12(0,-550) 13(0,-600) 14(0,-650) 15(354.33,-650) 16(354.33,-600) 17(354.33,-550) 18(354.33,-500) 19(354.33,-450) 20(354.33,-400) 21(354.33,-350) 22(354.33,-300) 23(354.33,-250) 24(354.33,-200) 25(354.33,-150) 26(354.33,-100) 27(354.33,-50) 28(354.33,0)
  silkscreen extent 63,-675 291,25

## Part data
C1 C2 C3 C4 C5 C6 C7 C8 C9 C10 C11 C12 C13 C14 C15 C16 C17 C18 C19 C20 C21 C22 C23 C24 C25 C26 C27 C28 C29 C30 C31 C32 C33 C34 C35 C36 C38 C39 C40 C41 C42 C43 C44 C45 C46 C47 C49 C50 C52 C53 C55 C56 C57 C58 C60 C61 C62 C63 C64 C65 C80: library part Cap, "Capacitor"
C48 C51: "Polarized Capacitor (Radial)"
CON1: "3M™ Card Connector SD™"
CP1 CP2: library part "Cap Pol1", "Polarized Capacitor (Radial)"
D1 D2 D3 D4: "High Conductance Fast Diode"
LED0 LED1: "Typical INFRARED GaAs LED"
LS1 LS2: "Loudspeaker"
P1: library part "Header 5X2", "MOLEX power connector"
P2: "Header, 5-Pin"
P_Debug P_Multi: "Header, 2-Pin"
P_Touch: "Header, 3-Pin"
R1 R2 R3 R4 R5 R6 R7 R8 R9 R10 R11 R12 R13 R14 R15 R16 R17 R18 R19 R20 R21 R22 R23 R24 R25 R26 R27 R28 R29 R30 R31 R32 R33 R34 R35 R36 R37 R38 R39 R40 R_LED0 R_LED1: library part Res1, "Resistor"
S1: library part SW-SPST, "Single-Pole, Single-Throw Switch"
U1: library part STM32F439IIT6, "Arm Cortex M4 Processor"
U2: "16 M High Speed Asynchronous CMOS SRAM with 3.3 V Supply, 1 M x 16, -40 to 85 degC, 48-Pin SOP (TSOP-1-48), Pb-Free"
Y1 Y2 Y3: library part XTAL, "Crystal Oscillator"

## Free pads (board coordinates)
  round 50 hole 35: 0(2359,1599) 1(2468,1599) 2(1859,1150) 3(1770,1202) 4(5611,2871) 5(5212,2884)
  round 35 smd: 6(3289,2623) 7(3425,1831)

## Via types
v1: diameter 25, hole 15, Top Layer to Bottom Layer, 342 vias

## Nets (pads, with @x,y where several pads share a name; then routed paths per layer and width w, separated by ;. In a path a pad name is that pad's centre, name@x,y a point inside that pad or via, vN(x,y) a via of type N, cw(c..) or ccw(c..) an arc to the next point about the centre after c; other vN are vias at no path point)
3V3P: C5.2 C6.2 C7.2 C8.2 C9.2 C10.2 C11.2 C12.2 C16.2 C17.2 C18.2 C19.2 C20.2 C21.2 C22.2 C23.2 C24.2 C25.2 C27.2 C28.2 C29.2 C30.2 C31.2 C32.2 C33.1 C35.2 C36.2 C38.2 C58.2 C62.2 C63.2 C64.2 C65.2 C80.2 CON1.4 CON2.A41 CON2.A42 CON3.1 CP1.2 P1.1 P2.1 P_Touch.3 R1.2 R2.2 R3.2 R4.2 R5.2 R6.1 R7.1 R8.1 R9.1 R10.1 R11.1 R12.1 R13.1 R14.1 R15.1 R16.1 R17.1 R18.1 R19.1 R20.1 R21.1 R23.2 R24.2 R26.1 U1.15 U1.23 U1.36 U1.38 U1.39 U1.49 U1.62 U1.72 U1.82 U1.91 U1.103 U1.114 U1.127 U1.136 U1.149 U1.159 U1.171 U1.172 U2.12 U2.36 U3.16 U4.16 U5.1 U5.7 U5.8 U5.14 U5.16 U5.23 U5.24 | length 7290.8
  Top Layer w8: C29.2@5315,1398.53 v1(5315,1465) ; v1(5333,567) 5333,643.47 C58.2@5335,645.47
  Top Layer w10: C33.1@743,821.53 v1(743,911) ; v1(3096,873) 3162.47,873 C7.2@3171.47,882 ; v1(3108,614) 3160.47,614 C8.2@3172.47,626 ; v1(3110,1079) C6.2@3171.47,1079 ; 3148.9,1334.43 v1(3114.57,1334.43) 3163,1286 C25.2@3172.47,1286 ; v1(3345,435) C9.2@3345,492.47 ; 3521.82,1549 3522,1548.82 C24.2@3522,1486.53 ; C10.2@3600,496.47 3612,484.47 v1(3612,430) ; v1(3624,1337) 3624,1457 3652.53,1485.53 C23.2@3678,1485.53 v1@3678,1542 ; C11.2@3817,496.47 3824,489.47 v1(3824,425) ; C12.2@4057.47,492 v1(4151,492) ; C19.2@4165.53,1073 4221.96,1073 4226,1077.04 v1(4226,1088) ; C20.2@4165.53,1335 4204,1335 v1(4230,1309) ; U4.16@6226,3150 v1(6263,3113)
  Top Layer w12: v1(272,400) 272,447.47 C35.2@292,467.47 ; C36.2@342,820.53 v1(342,891) ; v1(642,389) 642,385 C38.2@642,465.47 ; R16.1@2399.37,3717 v1(2465,3717) ; v1(3063,2969) 3136.63,2969 R6.1@3138.63,2971 R7.1@3138.63,3074 ; R4.2@3353,3158.37 v1(3353,3225) ; R5.2@3460,3158.37 v1(3460,3233) ; v1(3585,2477) 3586,2477 3617.4,2445.6 CON2.A41@3617.4,2410 CON2.A42@3637.09,2410 ; v1(3646,3267) C28.2@3695.47,3267 ; C27.2@3722.96,3071.43 v1(3722.96,3007.96) v1@3725,3010 ; C22.2@3900,1487.53 C21.2@3974,1487.53 3974,1493 4005,1524 4005,1575 ; R1.2@3927,3151.37 v1(3927,3225) ; R2.2@4028,3151.37 v1(4028,3224) ; C18.2@4164.53,881 4224.34,881 4232.34,889 v1(4254,889) ; v1@4199.72,2642.28 CON3.1@4260,2642.28 ; R3.2@4214.37,3075 v1(4284,3075) ; v1(4524,218) 4602.37,218 R18.1@4605,220.63 ; v1(4942,3727) R17.1@5010.63,3727 ; U3.16@5680.47,3150 v1(5747,3150) ; v1(6110,145) R19.1@6110,215.63
  Top Layer w25: R14.1@479.63,2435 480,2435.37 v1(480,2510) ; v1(515,2630) 585.63,2630 R12.1@590.63,2635 ; CP1.2@680,3325.74 P1.1@680,3600 ; R13.1@1643.37,1396 v1(1709,1396) ; R15.1@1735,2511.37 v1(1803.63,2511.37) ; v1(3405,1144) C16.2@3405,1214.47 ; v1(3846,718) 3909.53,718 C17.2@3913,721.47 ; C30.2@5329,1061.53 5330,1062.53 v1(5330,1100) ; R11.1@5550,2484.37 v1(5614.37,2484.37) ; R10.1@6410,2834.37 v1(6480.63,2834.37) ; R9.1@6624.37,1420 v1(6690,1420) ; v1(6635.63,2504.37) R8.1@6710,2504.37
  Bottom Layer w8: U2.12@5315,1398.11 v1(5315,1465) ; v1(5333,567) 5333,639.89 U2.36@5335,641.89
  Bottom Layer w10: U5.8@592,428 U5.8@592,466 ; U5.23@692,820.33 692,887 716,911 v1(743,911) ; U5.24@742,820.33 v1@742,910 ; U5.1@942,466 v1(942,558) ; v1(2129,1176) 2129,1110.37 R23.2@2233,1110.37 ; v1(3096,873) 3099.66,873 3108.33,881.67 U1.149@3173.17,881.67 ; v1(3108,614) 3131.51,614 3143.51,626 U1.136@3172.93,626 ; v1(3110,1079) U1.159@3172.69,1079 ; U1.171@3173.17,1314.74 3134.26,1314.74 v1(3114.57,1334.43) U1.172@3173.17,1334.43 ; v1(3345,435) U1.127@3345,493.3 ; v1(3510,1557) 3513.62,1557 3521.62,1549 ; U1.15@3521.59,1486 3521.8,1486.21 3521.8,1549.18 ; U1.114@3600,493.55 3603.11,490.44 3603.11,459.21 3612,450.32 v1(3612,430) ; v1(3669,1546) 3674.29,1540.71 3674.29,1488.78 U1.23@3678.07,1485 ; U1.103@3817,493.74 3819.64,491.1 3819.64,429.36 v1(3824,425) ; U1.36@3934,1486.98 3934,1524 3999,1589 v1(4005,1589) ; U1.91@4052.08,492.88 4052.08,462.99 4080.07,435 4118,435 4151,468 v1(4151,492) ; U1.49@4164.29,1333.43 4205.57,1333.43 v1(4230,1309) ; U1.62@4165.29,1078.52 4168.07,1081.3 4219.3,1081.3 v1(4226,1088) ; C32.2@6190.53,3150 6226,3150 v1(6263,3113)
  Bottom Layer w12: v1(111,1549) R26.1@179.63,1549 ; v1(272,400) 272,446 U5.14@292,466 ; U5.16@342,820.33 v1(342,891) ; U5.8@592,466 U5.7@642,466 v1(642,389) ; v1(3585,2477) 3621.47,2477 C62.2@3637.47,2461 ; v1(3585,2530) C63.2@3636.47,2530 ; v1(3722.96,3007.96) CON1.4@3722.96,3074.27 ; U1.38@3973.34,1485 U1.39@3993.03,1485 3993.03,1536.03 4005,1548 v1(4005,1589) ; U1.72@4164.29,880.67 4167.07,883.45 4248.45,883.45 v1(4254,889) ; U1.82@4165,684.53 4220.01,684.53 4220.13,684.41 4285.88,684.41 C80.2@4286,684.53 4287.47,686 v1(4351,686) ; v1(4193,2649) C64.2@4250.47,2649 ; v1(4284,3075) 4338,3021 R20.1@4338,2937.37 ; R21.1@4451,2935.37 v1(4451,3017) ; C31.2@5680.53,3150 v1(5747,3150)
  Bottom Layer w25: v1(3781,2657) C65.2@3860.47,2657
3V3PB: C13.1 P1.3 U1.6 | length 3630.6
  Top Layer w8: C13.1@3344.43,1488.1 v1@3344.43,1549.57
  Top Layer w12: v1(2726.5,1719) v1(2942,1719) ; v1(3214,1670) 3214,1502 3240,1476 3270.85,1476 v1@3344.43,1549.57
  Bottom Layer w8: v1(3340.85,1546) 3340.85,1489.57 U1.6@3344.43,1486
  Bottom Layer w12: P1.3@845.5,3600 v1(2726.5,1719) ; v1(2942,1719) 3165,1719 v1(3214,1670)
5V0P: C44.2 C57.2 CP2.2 P1.5 R29.1 R36.1 U8.6 U9.6 | length 4415.4
  Top Layer w25: CP2.2@1010,3320.74 P1.5@1010,3599.1 ; R29.1@1574,988.37 v1(1574,1115) 1669,1115 1847.53,936.47 C57.2@1847.53,761 ; v1(1696,568) v1(1699,381) ; 1847.53,694.47 C57.2@1847.53,761 ; v1(1920,573) 1920,738 1897,761 C57.2@1847.53,761
  Bottom Layer w25: CP2.2@1010,3320.74 1198,3132.74 1198,1634 1574,1258 v1(1574,1115) ; R36.1@1574,974.37 v1@1574,1107 ; v1(1696,568) 1818,568 ; v1(1699,381) 1757,381 C44.2@1794,344 ; 1782,510 1782,534 1818,568 ; v1(1920,573) 1909.5,562.5 1870.75,562.5 1870.25,562 1843.75,562 1843.25,562.5 1823.5,562.5 1818,568
5V0P_A: C43.2 C47.1 P1.9 R34.1 U6.7 U7.8 | length 5982.9
  Top Layer w8: U6.7@493,462 493,393 503.53,382.47 C43.2@503.53,347 503.53,299.47 563,240 v1(927,240) ; v1(1040,173) 1040,191 1070.37,221.37 ; R34.1@1070.37,95 1070.37,221.37 ; U7.8@1141,374.4 1142,373.4 1142,293 1070.37,221.37
  Top Layer w20: U7.8@1141,374.4 1218.4,374.4 v1(1234,390)
  Bottom Layer w8: v1(927,240) 928,240 955,213 955,165.77 982.27,138.5 1005.5,138.5 v1(1040,173)
  Bottom Layer w20: C47.1@1145,390.47 v1@1233.53,390.47 ; v1(1234,390) 1234,1065 335,1964 335,3466 592,3723 1181,3723 1304,3600 P1.9@1341.7,3600
19V2P: C60.2 C61.2 CON2.A3 CON2.A4 P1.7 | length 2680.5
  Top Layer w12: CON2.A3@2869.37,2410 CON2.A4@2889.06,2410 2889.06,2517.94 2873,2534 v1(2873,2541)
  Bottom Layer w12: P1.7@1176.3,3600 2518.3,2258 2852,2258 2875.53,2281.53 C60.2@2875.53,2484 ; v1(2873,2541) 2873,2486.53 C60.2@2874,2485.53
19V2P_RET: C60.1 C61.1 CON2.A1 CON2.A2 P1.8 | length 2563.8
  Top Layer w12: v1(2815,2544) 2815,2425 CON2.A1@2830,2410 CON2.A2@2849.69,2410
  Bottom Layer w12: P1.8@1176.3,3817 1303.3,3690 1410,3690 2616,2484 C60.1@2816.47,2484 ; v1(2815,2544) 2815,2485.47 C60.1@2816.47,2484 ; C61.1@2816.47,2333 C60.1@2816.47,2484
AUDIO_DAC1: C49.1 U1.50 | length 2572.4
  Top Layer w8: C49.1@3404.53,139 3687,139 3693,145 v1(3714,145) ; v1(3992,986) 4118,986 4180.5,923.5 4326.5,923.5 4429,821 v1(4429,713) ; v1(4298,249) v1(4298,431)
  Bottom Layer w8: v1(3714,145) 3692.5,166.5 3692.5,217.71 3723.79,249 v1(4298,249) ; v1(3992,986) 3992,1192 4113.74,1313.74 U1.50@4164.29,1313.74 ; v1(4298,431) 4298,463 4429,594 v1(4429,713)
AUDIO_DAC2: C55.1 U1.51 | length 2542.9
  Top Layer w8: C55.1@3407.53,270 3480.53,197 v1(3716,197) ; v1(4021,1025) 4125.59,1025 4214.09,936.5 4332.5,936.5 4479,790 v1(4479,713) ; v1(4390,242) v1(4390,438)
  Bottom Layer w8: v1(3716,197) 3716,220 3723,227 4286.77,227 4288.27,225.5 4307.73,225.5 4309.23,227 4375,227 v1(4390,242) ; v1(4021,1025) 4021,1199 4116.05,1294.05 U1.51@4164.29,1294.05 ; v1(4390,438) 4479,527 v1(4479,713)
BTN_A: A.1 R8.2 U3.6 | length 2391.1
  Top Layer w8: v1(5359,3007) 5374.05,3022.05 U3.6@5460,3022.05 ; v1(6640.37,2425.63) R8.2@6710,2425.63
  Top Layer w20: A.1@6710,1753.85 R8.2@6710,2425.63
  Bottom Layer w8: v1(5359,3007) 5359,2972.43 5799.43,2532 6534,2532 v1(6640.37,2425.63)
BTN_B: B.1 R9.2 U3.5 | length 2937.4
  Top Layer w8: v1(5386,3050) 5457.64,3050 U3.5@5460,3047.64
  Top Layer w20: B.1@5859.85,1420 R9.2@6545.63,1420 v1(6545.63,1486.37)
  Bottom Layer w8: v1(5386,3050) 5352,3050 5330,3028 5330,2980.21 6490,1820.21 6490,1677.21 6545.63,1621.58 v1(6545.63,1486.37)
BTN_DWN: DOWN.1 R13.2 U3.13 | length 8025
  Top Layer w8: DOWN.1@864.79,1397.15 826.74,1397.15 369,1854.89 369,2463 466,2560 1430,2560 2296,3426 2399.57,3426 2556.57,3583 5172.43,3583 5558,3197.43 5558,3118.43 5603.2,3073.23 U3.13@5680.47,3073.23
  Top Layer w20: DOWN.1@865.94,1396 R13.2@1564.63,1396
BTN_LFT: LEFT.1 R14.2 U3.12 | length 6536.7
  Top Layer w8: R14.2@558.37,2435 666,2435 757,2526 1458,2526 2337,3405 2399.79,3405 2562.79,3568 5166.21,3568 5543,3191.21 5543,3112.21 5607.58,3047.64 U3.12@5680.47,3047.64
  Top Layer w20: LEFT.1@558.37,1751.57 R14.2@558.37,2435
BTN_LS: LEFT_SHOULDER.2 R16.2 U4.6 | length 4371.7
  Top Layer w8: LEFT_SHOULDER.2@2150,3720 LEFT_SHOULDER.2@2153,3717 ; R16.2@2320.63,3717 LEFT_SHOULDER.2@2153,3717 ; U4.6@5970,3022.05 5907.95,3022.05 5833,3097 5833,3131.79 5441.79,3523 5274.85,3523 5184.85,3613 2544.15,3613 2454.15,3523 2347,3523 LEFT_SHOULDER.2@2153,3717
BTN_RIGHT: R15.2 RIGHT.1 U3.11 | length 5728.7
  Top Layer w8: RIGHT.1@1735.85,2311 1637,2409.85 1637,2621 2569,3553 5160,3553 5528,3185 5528,3106 5611.95,3022.05 U3.11@5680.47,3022.05
  Top Layer w20: RIGHT.1@1735.85,1749.79 RIGHT.1@1735.85,2299 1735.85,2311 R15.2@1735.85,2431.78
BTN_RS: R17.2 RIGHT_SHOULDER.2 U4.5 | length 1172.5
  Top Layer w8: R17.2@5089.37,3727 RIGHT_SHOULDER.2@5253,3727 ; RIGHT_SHOULDER.2@5260,3720 5266,3720 5854,3132 5854,3097.21 5903.58,3047.64 U4.5@5970,3047.64
BTN_SEL: R19.2 SELECT.1 U4.3 | length 4506.9
  Top Layer w8: SELECT.1@5420,303.15 SELECT.1@5969.21,303.15 5977.99,294.37 R19.2@6110,294.37 6112.34,294.37 6727,909.03 6727,911.37 6741.04,925.41 6743.38,925.41 6749.84,931.87 6749.84,1459.16 6601,1608 6601,2842 6175,3268 6078.79,3268 6031,3220.21 6031,3122 6007.82,3098.82 U4.3@5970,3098.82 U4.3@5969.18,3098
BTN_STRT: R18.2 START.1 U4.4 | length 6007
  Top Layer w8: R18.2@4608.78,303.15 START.1@4720,303.15 START.1@5269.21,303.15 5385.06,419 6213.42,419 ; U4.4@5968.77,3072 U4.4@5970,3073.23 6004.23,3073.23 6046,3115 6046,3214 6085,3253 6168.79,3253 6586,2835.79 6586,1601.79 6733.83,1453.95 6733.83,1367.6 6734.83,940.42 6213.42,419 ; 6734.84,940.43 6213.42,419
BTN_UP: R12.2 U3.14 UP.1 | length 5659
  Top Layer w8: UP.1@1414,2637.85 2223.15,3447 2399.36,3447 2550.36,3598 5178.64,3598 5575,3201.64 5575,3122.64 5598.82,3098.82 U3.14@5680.47,3098.82
  Top Layer w20: R12.2@669.37,2635 UP.1@861.94,2635 ; UP.1@864.79,2637.85 UP.1@1414,2637.85
BTN_X: R10.2 U3.4 X.1 | length 1797.2
  Top Layer w8: U3.4@5458.23,3075 U3.4@5460,3073.23 5459.73,3073.5 5357.97,3073.5 5285,3000.53 5285,2683 5339.15,2628.85 X.1@5856.79,2628.85
  Top Layer w20: X.1@5856.79,2628.85 X.1@6406,2628.85 6410,2632.85 R10.2@6410,2755.63
BTN_Y: R11.2 U3.3 Y.1 | length 1610.7
  Top Layer w8: U3.3@5460,3098.82 5395.87,3098.82 5395.55,3098.5 5357.31,3098.5 5270,3011.19 5270,2676.79 5541.16,2405.63 R11.2@5550,2405.63
  Top Layer w20: Y.1@5550,1747.94 R11.2@5550,2405.63
CLK_OUT: U1.119
"DATA REQ": U5.28
FILT: C41.2 R27.1 U5.19 | length 825.2
  Top Layer w12: v1(78,767) 76,769 76,866 135,925 400,925 431,894 v1(492,894)
  Bottom Layer w12: v1(78,767) 85.53,759.47 C41.2@143,759.47 143,708.37 R27.1@87,652.37 ; U5.19@492,820.33 v1(492,894)
FMC_A0: U1.16 U2.5 | length 1943.6
  Bottom Layer w8: U1.16@3540.28,1485 3540,1485.28 3540,1570 3657.5,1687.5 4977.5,1687.5 5177.36,1487.64 U2.5@5177.36,1397.95
FMC_A1: U1.17 U2.4 | length 1890.7
  Bottom Layer w8: U1.17@3559.96,1485 U1.17@3559.96,1485 3560,1567.43 3665.07,1672.5 4974.12,1672.5 5157.68,1488.94 U2.4@5157.68,1397.95
FMC_A2: U1.18 U2.3 | length 1838.7
  Bottom Layer w8: U1.18@3579.64,1485 3579.64,1565.86 3671.29,1657.5 4970.73,1657.5 5137.99,1490.24 U2.3@5137.99,1397.95
FMC_A3: U1.19 U2.2 | length 1786.8
  Bottom Layer w8: U1.19@3599.33,1485 3599.33,1564.33 3677.5,1642.5 4967.35,1642.5 5118.31,1491.54 U2.2@5118.31,1397.95
FMC_A4: U1.20 U2.1 | length 1732.1
  Bottom Layer w8: U1.20@3619.02,1485 3619.02,1558.06 3688.46,1627.5 4963.96,1627.5 5098.62,1492.84 U2.1@5098.62,1397.95
FMC_A5: U1.21 U2.48 | length 2422.2
  Top Layer w8: v1(5053,1343) 5053,730 v1(5057,726)
  Bottom Layer w8: U1.21@3638.7,1485 3638.7,1553.93 3697.27,1612.5 4923.5,1612.5 5053,1483 v1(5053,1343) ; v1(5057,726) 5059,726 5098.62,686.38 U2.48@5098.62,642.05
FMC_A6: U1.60 U2.47 | length 1385.7
  Top Layer w8: v1(5108,745) 5108,1033 v1(5115,1040)
  Bottom Layer w8: U1.60@4164.29,1116.89 5038.11,1116.89 v1(5115,1040) ; v1(5108,745) 5108,714.59 5119,703.59 U2.47@5119,644.35
FMC_A7: U1.63 U2.46 | length 1356.7
  Top Layer w8: v1(5141,723) v1(5141,998)
  Bottom Layer w8: U1.63@4164.29,1057.84 5062.16,1057.84 5122,998 v1(5141,998) ; U2.46@5138,644.05 5138,720 v1(5141,723)
FMC_A8: U1.64 U2.45 | length 1357
  Top Layer w8: v1(5163,957) 5162.46,956.46 5162.46,760.54 v1(5172,751)
  Bottom Layer w8: U1.64@4164.29,1038.15 5041.85,1038.15 5123,957 v1(5163,957) ; U2.45@5157,642.72 5157,692 5172,707 v1(5172,751)
FMC_A9: U1.65 U2.30 | length 1528.1
  Bottom Layer w8: U1.65@4164.29,1018.47 4166.32,1020.5 4529.12,1020.5 4661.62,888 5346.62,888 5452.95,781.66 U2.30@5452.95,642.05
FMC_A10: U1.66 U2.29 | length 1593.5
  Top Layer w8: v1(4498,999) 4594,999 4595,998 v1@4596,999 ; v1(4596,1004) v1@4596,999 ; v1@4596,999 4596,995 4600,999 v1@4596,999
  Bottom Layer w8: U1.66@4164.29,998.78 4514,998.78 ; v1(4596,1004) 4596,972 4667,901 5352,901 5472.64,780.36 U2.29@5472.64,642.05
FMC_A11: U1.67 U2.28 | length 1557.7
  Top Layer w8: v1(4335,968) 4366,937 4366.91,937.91 4681.91,937.91 v1(4686.46,942.46)
  Bottom Layer w8: U1.67@4164.38,979 4164.88,979.5 4323.5,979.5 v1(4335,968) ; v1(4686.46,942.46) 4686.46,939.54 4712,914 5363,914 5492.32,784.68 U2.28@5492.32,642.05
FMC_A12: U1.106 U2.27 | length 2064.9
  Bottom Layer w8: U1.106@3756.81,492.88 3756.81,370.75 3795.06,332.5 5276.69,332.5 5512.01,567.82 U2.27@5512.01,642.05
FMC_A13: U1.107 U2.26 | length 2116.8
  Bottom Layer w8: U1.107@3737.13,492.88 3737.13,369.22 3788.84,317.5 5280.07,317.5 5531.69,569.12 U2.26@5531.69,642.05
FMC_A14: U1.108 U2.25 | length 2170.4
  Bottom Layer w8: U1.108@3717.44,492.88 3722.13,488.19 3722.13,363 3782.63,302.5 5286.29,302.5 5551.38,567.59 U2.25@5551.38,642.05
FMC_A15: U1.109 U2.24 | length 2986.3
  Bottom Layer w8: U1.109@3697.75,492.88 3697.75,366.16 3776.42,287.5 5292.5,287.5 5569,564 5569,1310 5551.38,1327.62 U2.24@5551.38,1397.95
FMC_A16: U1.99 U2.23 | length 2365.3
  Top Layer w8: v1(4743,710) 4749,704 4913.54,704 4924.04,693.5 5146.91,693.5 5148.41,695 5152.41,695 5379,921.59 v1(5379,938)
  Bottom Layer w8: U1.99@3894.6,492.88 3894.6,425.4 3912.5,407.5 4440.5,407.5 v1(4743,710) ; v1(5379,938) 5443,938 5534.5,1029.5 5534.5,1395.15 U2.23@5531.69,1397.95
FMC_A17: U1.100 U2.22 | length 2353.2
  Top Layer w8: v1(4790,678) 4792.5,680.5 5152.29,680.5 5153.79,682 5158.59,682 5455,978.41 5455,1085 5506,1136 v1(5513,1136)
  Bottom Layer w8: U1.100@3874.92,492.88 3874.92,423.87 3906.29,392.5 4504.5,392.5 v1(4790,678) ; U2.22@5511.28,1397.95 5511.28,1137.72 v1(5513,1136)
FMC_A18: U1.101 U2.21 | length 2429.3
  Top Layer w8: v1(4833,659) 5229,659 5269,699 5269,759 5493,983 v1(5493,1028)
  Bottom Layer w8: U1.101@3855.23,492.88 3855.23,422.34 3900.07,377.5 4526.67,377.5 4808.17,659 v1(4833,659) ; U2.21@5492.32,1397.95 5493,1397.28 5493,1146.41 5491.5,1144.91 5491.5,1029.5 v1(5493,1028)
FMC_A19: U1.2 U2.20 | length 2608.6
  Bottom Layer w8: U1.2@3264.68,1485 3264.68,1549.68 3305.5,1590.5 3313.73,1590.5 3327.5,1604.27 3327.5,1622.73 3405.27,1700.5 3497.58,1700.5 3509.27,1688.81 3528.73,1688.81 3542.43,1702.5 3804.27,1702.5 3804.77,1703 5382,1703 5472.64,1612.36 U2.20@5472.64,1397.95
FMC_D0: U1.104 U2.8 | length 2332.4
  Top Layer w8: v1(4936,721) 4951.5,736.5 4951.5,1244.91 4977.59,1271 v1(5007,1271)
  Bottom Layer w8: U1.104@3796.18,492.88 3796.18,376.82 3810.5,362.5 4532.88,362.5 4578.38,408 4625,408 4936,719 v1(4936,721) ; v1(5007,1271) 5181.62,1271 5236.42,1325.8 U2.8@5236.42,1397.95
FMC_D1: U1.105 U2.9 | length 2391.2
  Top Layer w8: v1(4980,721) 4978,723 4978,1231 4986,1239 v1(5014,1239)
  Bottom Layer w8: U1.105@3776.49,492.88 3776.49,372.28 3801.27,347.5 4539.1,347.5 4584.6,393 4643,393 4971,721 v1(4980,721) ; v1(5014,1239) 5017,1236 5165,1236 5256.1,1327.1 U2.9@5256.1,1397.95
FMC_D2: U1.142 U2.10 | length 2580.8
  Top Layer w8: v1(3636,708) 3636,745 4140,1249 v1(4622,1249)
  Bottom Layer w8: U1.142@3170.9,743 3376.59,743 3380.09,739.5 3607.5,739.5 3636,711 v1(3636,708) ; v1(4622,1249) 4622,1273 4646.5,1297.5 4831.5,1297.5 4921,1208 5195,1208 5275.79,1288.79 U2.10@5275.79,1397.95